# EAGLE board RGH3 Phat QSB v2 (EAGLE 9.7.0)
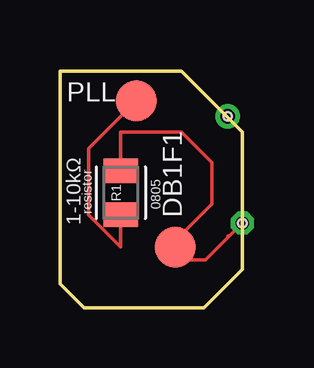
[diagram p0: board, top side]

Size 7.62 x 9.89 mm. Coordinates in mm from the lower left corner, seen from the top.
Outline: 0,1 0,9.89 5.08,9.89 7.62,7.35 7.62,1.62 6,0 1,0 0,1
Copper layers (1*16): Top 0.035mm / dielectric 0.75mm / Bottom 0.035mm
Design rules "default *": minimum track width 6mil, minimum drill 0.35mm, track to track 6mil, track to pad 6mil, pad to pad 6mil, via to via 6mil, smd to smd 6mil, copper to edge 40mil, drill to drill 6mil, minimum pad ring 10mil, minimum via ring 8mil, stop-mask expansion 4mil, vias tented up to drill 0mil, thermal gap 10mil
Holes 0.35 mm at 7,8 7.62,3.54

## Footprints (pad centres in the part's own frame; a part is rotated, then mirrored left to right if it is on the bottom)
TP17R = smd 1.7 x 1.7: TP 0,0
RESC2012X65 = smd 1.031 x 1.42: 1 -0.919,0; 2 0.919,0

## Placement (x,y rotation side)
DB1F1  PTR1TP17R  [TP17R]  4.81,2.54 0 top
PLL  PTR1TP17R  [TP17R]  3.19,8.65 180 top
R1  [RESC2012X65]  2.54,4.81 90 top

## Library data of the parts
DB1F1 PLL = testpad
R1 = Resistor; CATEGORY: Resistor; SUB-CATEGORY: Fixed

## Nets
DB: DB1F1.TP R1.2
N$2: PLL.TP R1.1

## Tracks (layer width: path | path; a pad name or v marks a point on that pad's centre or on a via)
DB
  Top 0.152: R1.2 2.54,7.35 5.08,7.35 6.35,6.08 6.35,4.35 4.81,2.81 DB1F1.TP
N$1  (via drill 0.6)
  other vias: 7,8
N$2
  Top 0.152: R1.1 2.54,2.54 1.19,3.89 1.19,6.65 PLL.TP
N$3  (via drill 0.55)
  Top 0.152: v7.62,3.54 6.08,2 5,2
S$1
  Top 0.152: 7.08,3 7,3

## Text on the board
tNames: PLL | 1-10kΩ | 0805 | resistor